# Altium PCB DVL_InterfaceRevA.PcbDoc
Units mil, origin at the board's own origin, x right, y up, seen from the top; angles counter-clockwise.
Board outline 1860 x 1770 mil, 2 copper layers (Top Layer, Bottom Layer); 27 components, 26 nets, 99 pads, 16 vias.
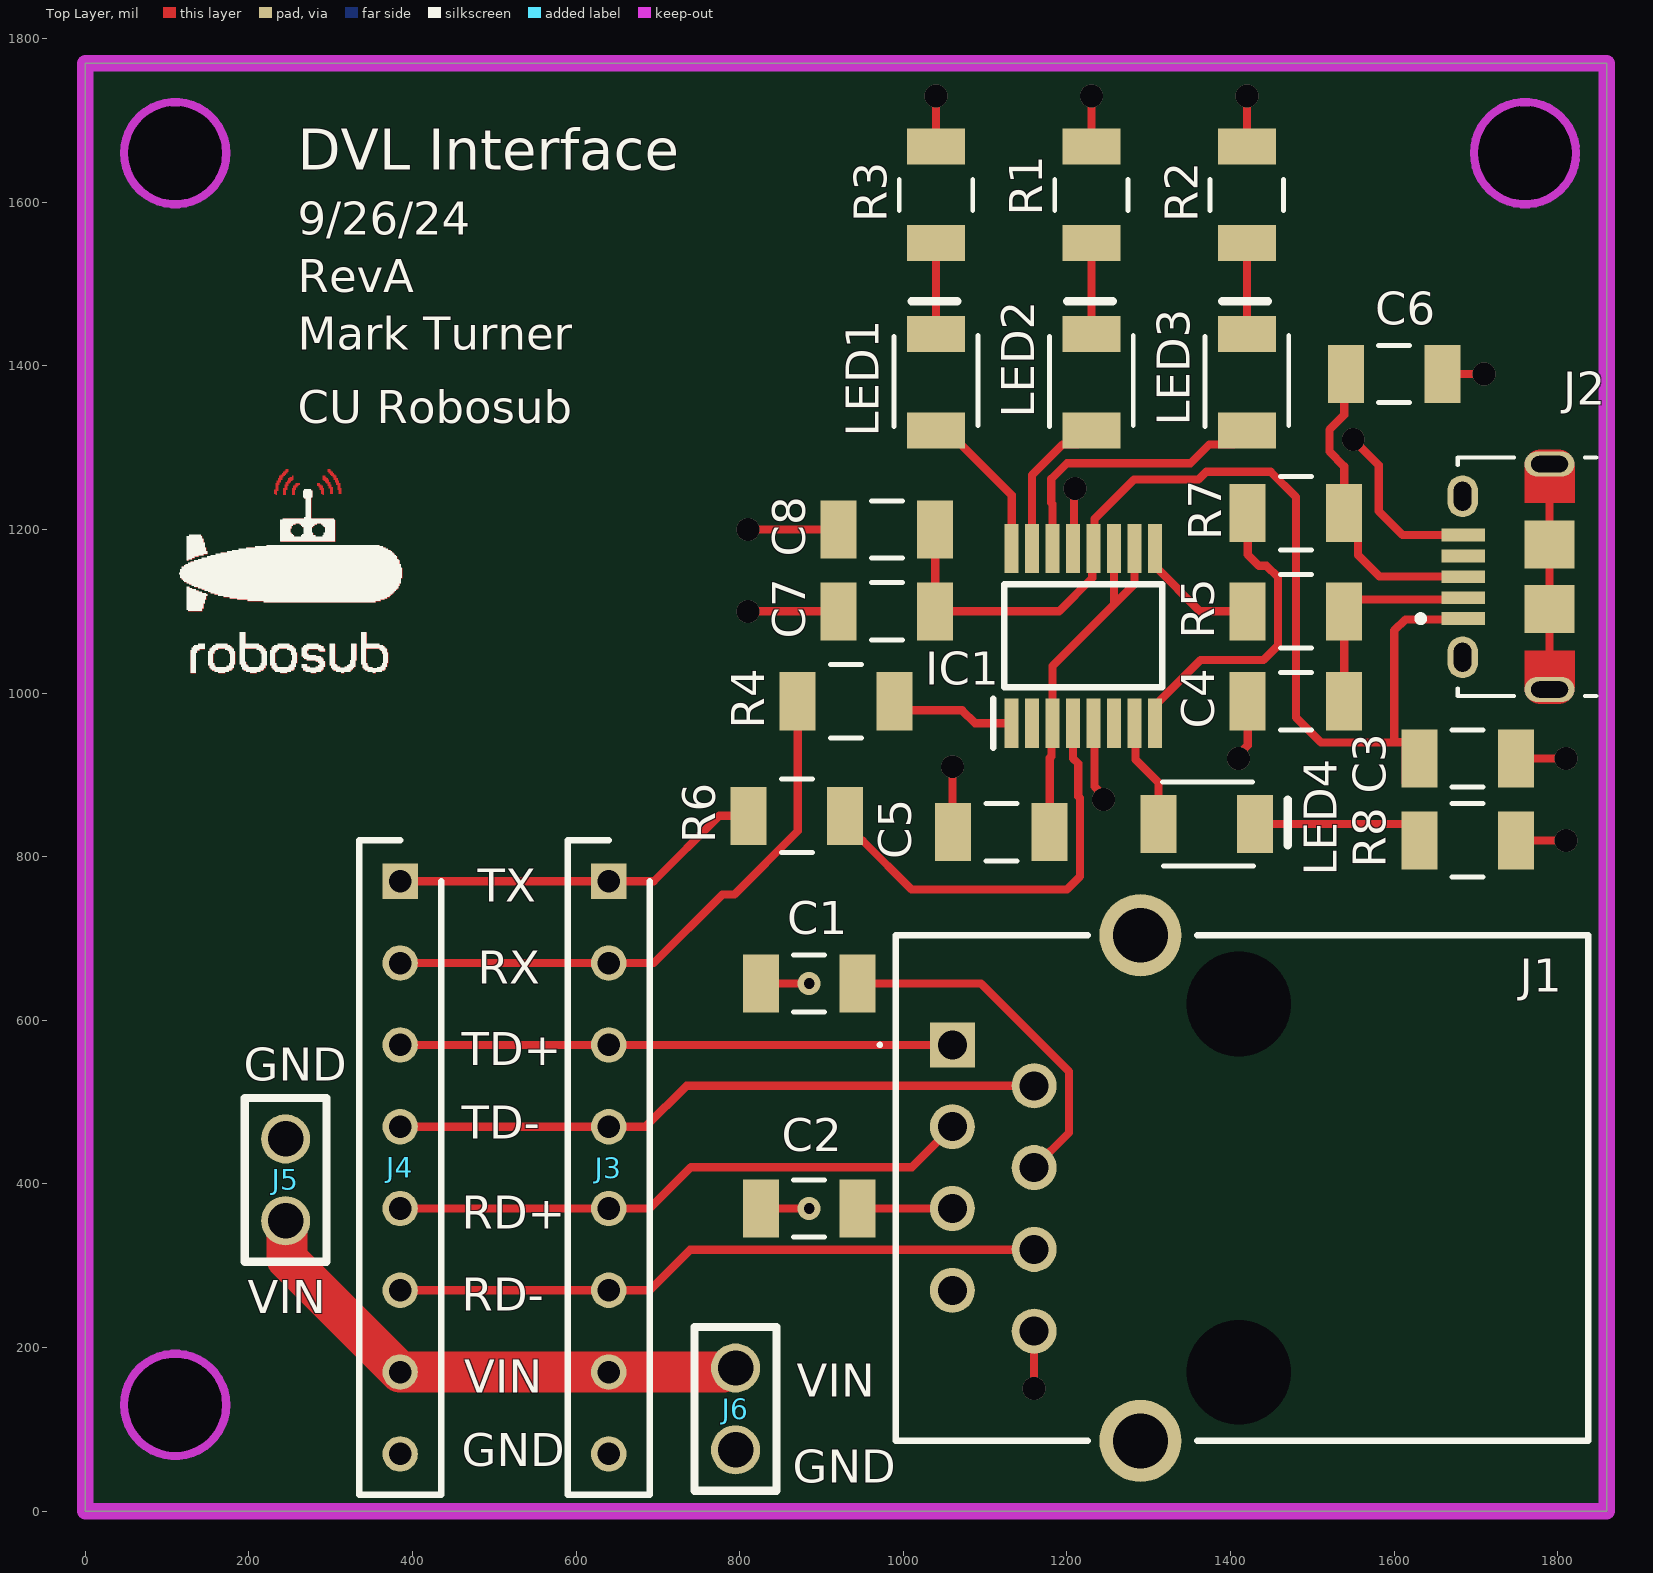
[diagram p0: Top Layer view]
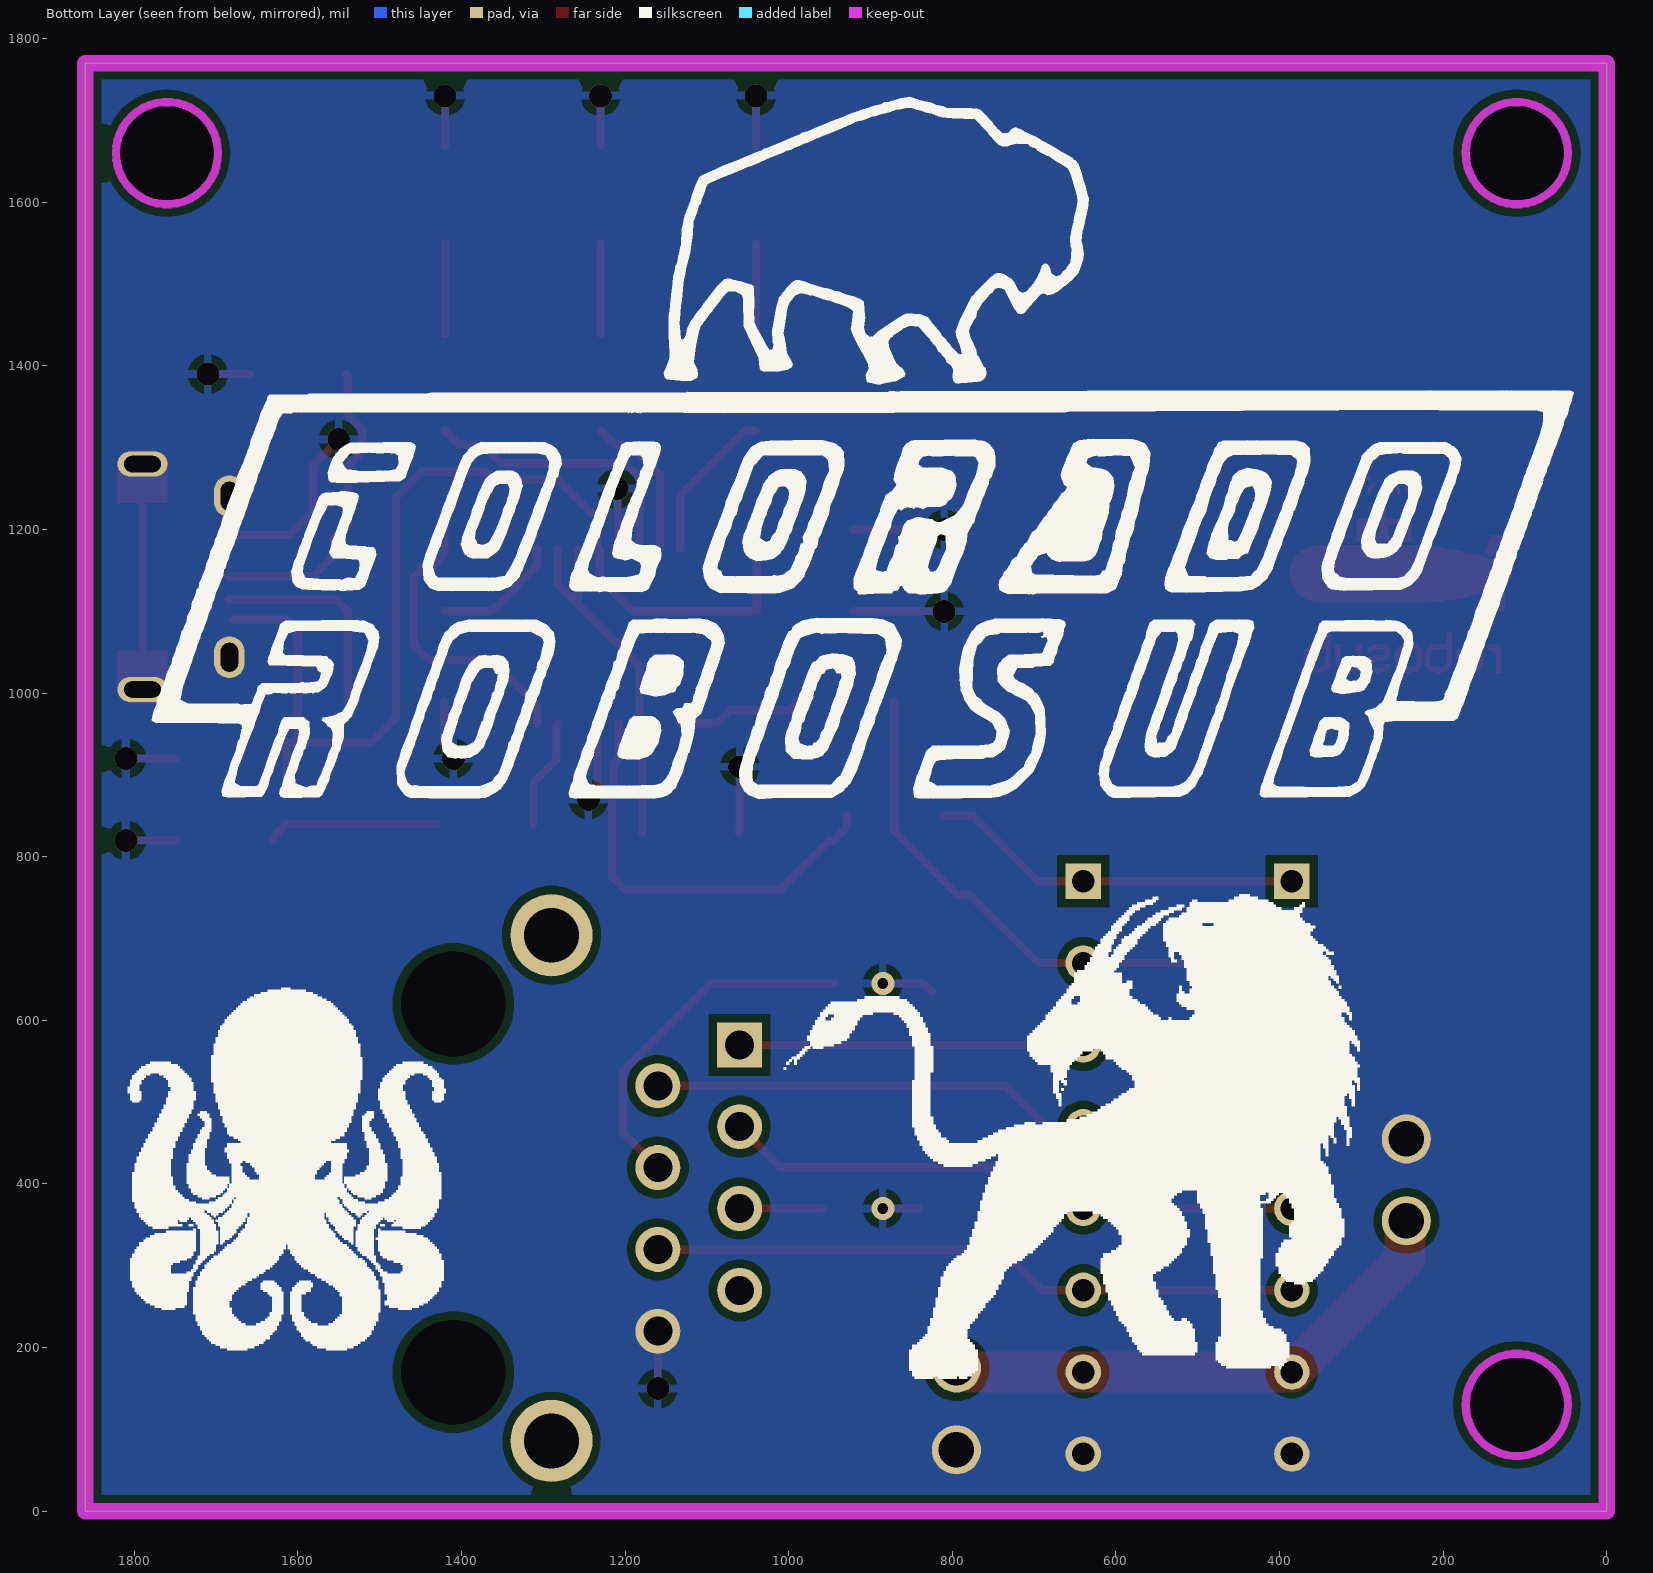
[diagram p1: Bottom Layer view, seen from below]
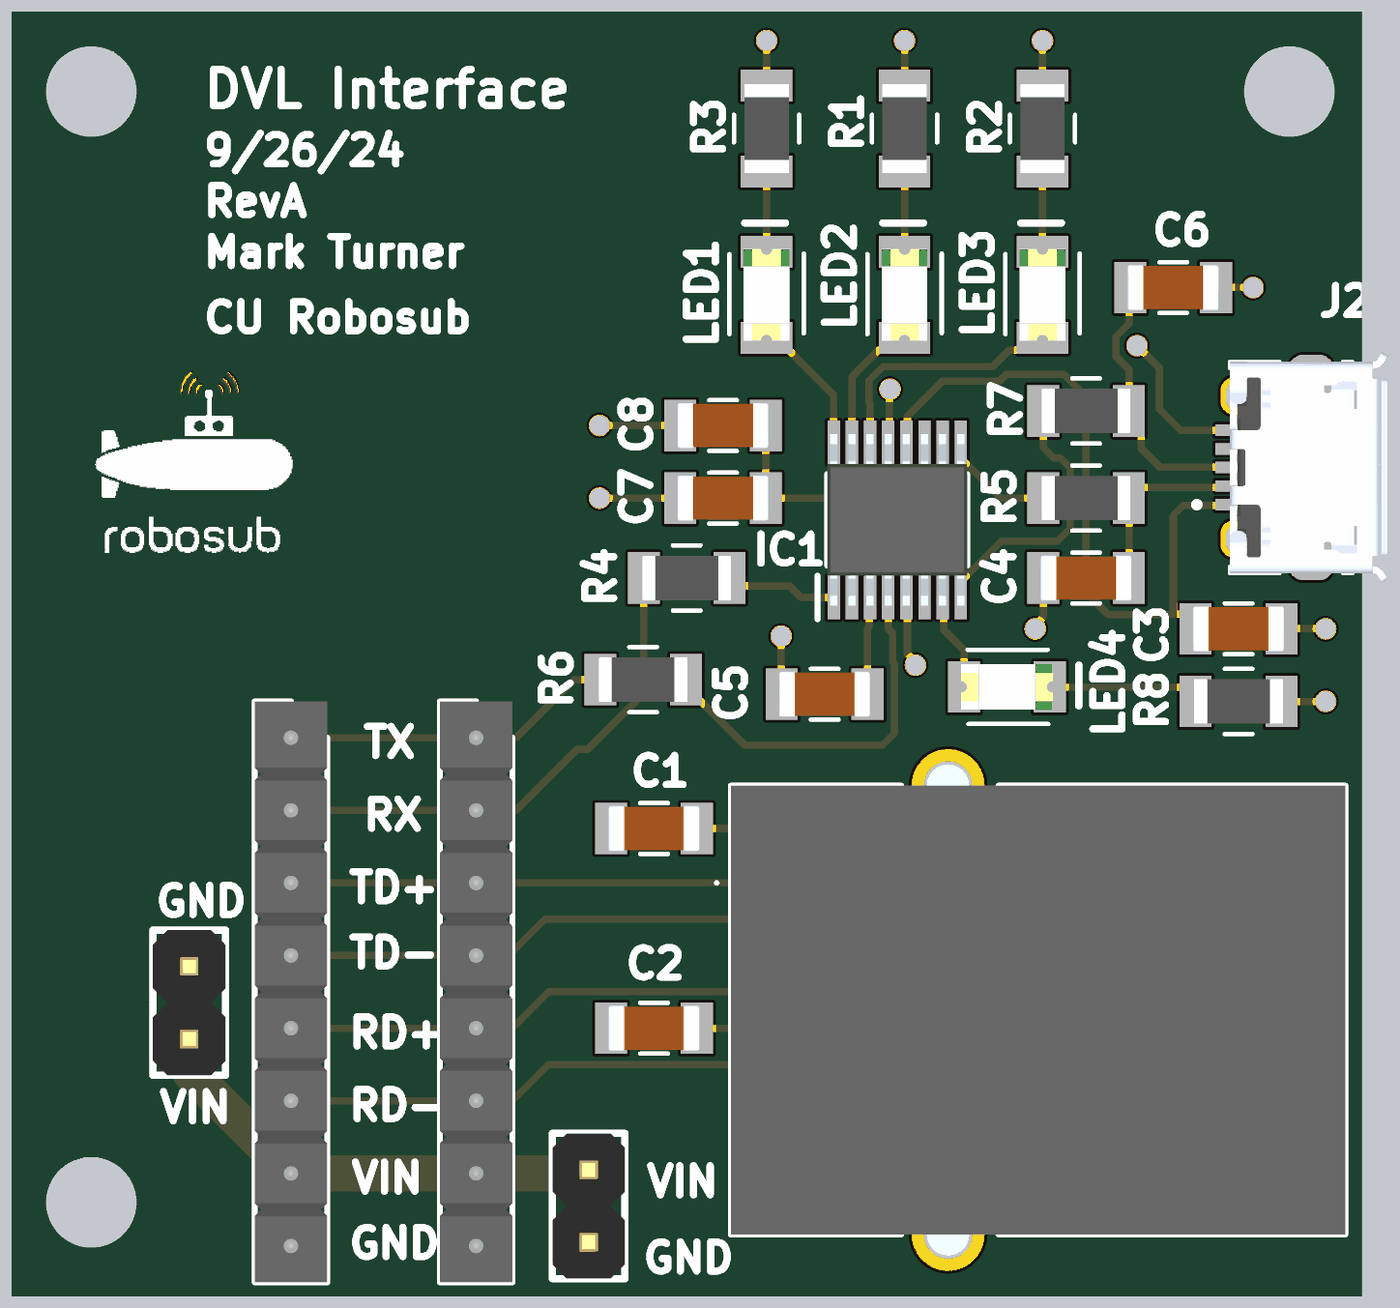
[diagram p2: 3D render of the assembled board from above, using the file's embedded part models]

## Layer stack, top to bottom
Top Solder: solder mask 0.4, Solder Resist, Dk 3.5
Top Layer: signal copper 1.4
Dielectric 1: dielectric 12.6, FR-4, Dk 4.8
Bottom Layer: signal copper 1.4
Bottom Solder: solder mask 0.4, Solder Resist, Dk 3.5

## Board outline
0,0 1860,0 1860,1770 0,1770
cut-out: 47.5,1660 cw(c110,1660) 110,1722.5 cw(c110,1660) 172.5,1660 cw(c110,1660) 110,1597.5 cw(c110,1660)
cut-out: 47.5,130 cw(c110,130) 110,192.5 cw(c110,130) 172.5,130 cw(c110,130) 110,67.5 cw(c110,130)
cut-out: 1697.5,1660 ccw(c1760,1660) 1760,1597.5 ccw(c1760,1660) 1822.5,1660 ccw(c1760,1660) 1760,1722.5 ccw(c1760,1660)

## Design rules (kind name [scope] priority, off if disabled: settings)
BoardOutlineClearance [All] p1: gap=10 ignorepadtopadclearanceinfootprint=FALSE except(0: Arc-SplitContinuation Track-SplitContinuation SMDPad-SplitContinuation THPad-SplitContinuation Via-SplitContinuation Fill-SplitContinuation Poly-SplitContinuation Region-SplitContinuation Text-SplitContinuation)
Clearance [All] p1: gap=10 ignorepadtopadclearanceinfootprint=FALSE
PlaneConnect [All] p1: planeconnectstyle=Direct reliefexpansion=20 reliefentries=4 reliefconductorwidth=10 reliefairgap=10
PolygonConnect [All] p1: thpad.connectstyle=Direct thpad.reliefconductorwidth=10 thpad.reliefentries=4 thpad.polygonreliefangle="90 Angle" thpad.airgapwidth=10 smdpad.connectstyle=Relief smdpad.reliefconductorwidth=10 smdpad.reliefentries=4 smdpad.polygonreliefangle="90 Angle" smdpad.airgapwidth=10 via.connectstyle=Relief via.reliefconductorwidth=10 via.reliefentries=4 via.polygonreliefangle="90 Angle" via.airgapwidth=10
RoutingVias [All] p1: holewidth=13 width=25 viastyle="Through Hole" minholewidth=13 minwidth=25 maxholewidth=60 maxwidth=80
SolderMaskExpansion [All] p1: expansion=4 istentingtop=FALSE
SupplyNets "Schematic Supply Nets" [InNet('GND')] p1: voltage=0.000
UnRoutedNet [All] p1: checkbadconnections=TRUE
Width "Schematic Width Constraint_1" [InNet('VIN')] p1: maxlimit=100 minlimit=10 preferedwidth=20 minimp=50.000000 maximp=50.000000 favimp=50.000000
Width "Schematic Width Constraint" [InNet('GND')] p2: maxlimit=100 minlimit=10 preferedwidth=20 minimp=50.000000 maximp=50.000000 favimp=50.000000
Width [All] p3: maxlimit=20 minlimit=6 preferedwidth=6 minimp=50.000000 maximp=50.000000 favimp=50.000000
28 further rules are at their usual default settings.

## Components (designator, comment, footprint, x,y, rotation, side; value= is the part's Value field where it differs from the comment)
C1 "DNI?" 1206_Passive_Capacitor 885,645 r180 top
C2 "DNI?_ 230/165nF" 1206_Passive_Capacitor 885,370 r180 top
C3 "10nF" 1206_Passive_Capacitor 1690,920 r180 top
C4 "47pF" 1206_Passive_Capacitor 1480,990 r0 top
C5 "100nF" 1206_Passive_Capacitor 1120,830 r0 top
C6 "47pF" 1206_Passive_Capacitor 1600,1390 r180 top
C7 "100nF" 1206_Passive_Capacitor 980,1100 r0 top
C8 "4.7uF" 1206_Passive_Capacitor 980,1200 r0 top
IC1 "FT230XS-R" SOP64P599X175-16N 1220,1070 r90 top
J1 "ARJM11D7-009-NN-EW2" ARJM11D7009NNEW2 1060,570 r90 top
J2 "10118194-0001LF" AMPHENOL_10118194-0001LF 1790,1142.2 r90 top
J3 "08-0625-70" HDRV8W51P0X254_1X8_2032X254X816P 640,770 r270 top
J4 "08-0625-70" HDRV8W51P0X254_1X8_2032X254X816P 385,770 r270 top
J5 "2 PIN" 2_PIN_100MIL 245,405 r90 top
J6 "2 PIN" 2_PIN_100MIL 795,125 r270 top
LED1 "Red" LED_1206 1040,1380 r90 top
LED2 "Red" LED_1206 1230,1380 r90 top
LED3 "Red" LED_1206 1420,1380 r90 top
LED4 "Red" LED_1206 1371,840 r0 top
R1 "10k" 1206_Passive_Resitor 1230,1609 r270 top value=50Ohm?
R2 "10k" 1206_Passive_Resitor 1420,1609 r90 top value=50Ohm?
R3 "10k" 1206_Passive_Resitor 1040,1609 r270 top value=50Ohm?
R4 "10k" 1206_Passive_Resitor 930,990 r0 top value=27Ohm?
R5 "27Ohm" 1206_Passive_Resitor 1480,1100 r0 top
R6 "10k" 1206_Passive_Resitor 870,850 r0 top value=27Ohm?
R7 "27Ohm" 1206_Passive_Resitor 1480,1220 r0 top
R8 "10k" 1206_Passive_Resitor 1690,820 r0 top value=50Ohm?

## Footprints (in the part's own frame and the unit in brackets; to place one, negate y for a bottom-side part, rotate by r counter-clockwise, add the part's x,y. Pads: shape width x height; smd on the part's side, far side on the other; paste and mask are expansions set on the pad)
2_PIN_100MIL [mil]
  round 60 hole 43.31: 1(-50,0) 2(50,0)
  silkscreen extent -100,-50 100,50, body extent -100,-50 100,50, height 336
1206_Passive_Capacitor [mil]
  rect 44x71 smd: 1(-59,0) 2(59,0)
  silkscreen extent -19,-35 19,35, body extent -63,-31 63,32, height 50
1206_Passive_Resitor [mil]
  rect 44x71 smd: 1(-59,0) 2(59,0)
  silkscreen extent -19,-45 19,45, body extent -61,-31 61,31, height 26
AMPHENOL_10118194-0001LF [mm]
  rect 0.4x1.35 smd: 1(-1.3,2.675) 2(-0.65,2.675) 3(0,2.675) 4(0.65,2.675) 5(1.3,2.675)
  oval 0.775x1.55 hole 0.5 slot 1.15 at 90 deg mask+0: SH1(-3.5,0) SH4(3.5,0)
  rect 1.5x1.55 smd: SH2(1,0) SH3(-1,0)
  oval 1.3x0.95 hole 0.55 slot 0.9 at 0 deg: SH5(-2.5,2.7) SH6(2.5,2.7)
  Top Layer region: -2.3,-0.775 -3.445,-0.775 -3.471,-0.774 -3.497,-0.772 -3.523,-0.769 -3.549,-0.764 -3.574,-0.758 -3.6,-0.751 -3.624,-0.742 -3.648,-0.732 -3.672,-0.721 -3.695,-0.708 -3.717,-0.694 -3.739,-0.68 -3.76,-0.664 -3.78,-0.647 -3.799,-0.629 -3.817,-0.61 -3.834,-0.59 -3.85,-0.569 -3.864,-0.547 -3.878,-0.525 -3.891,-0.502 -3.902,-0.478 -3.912,-0.454 -3.921,-0.43 -3.928,-0.404 -3.934,-0.379 -3.939,-0.353 -3.942,-0.327 -3.944,-0.301 -3.945,-0.275 -3.945,0.275 -3.944,0.301 -3.942,0.327 -3.939,0.353 -3.934,0.379 -3.928,0.404 -3.921,0.43 -3.912,0.454 -3.902,0.478 -3.891,0.502 -3.878,0.525 -3.864,0.547 -3.85,0.569 -3.834,0.59 -3.817,0.61 -3.799,0.629 -3.78,0.647 -3.76,0.664 -3.739,0.68 -3.717,0.694 -3.695,0.708 -3.672,0.721 -3.648,0.732 -3.624,0.742 -3.6,0.751 -3.574,0.758 -3.549,0.764 -3.523,0.769 -3.497,0.772 -3.471,0.774 -3.445,0.775 -2.3,0.775
  Top Layer region: 3.471,0.774 3.497,0.772 3.523,0.769 3.549,0.764 3.574,0.758 3.6,0.751 3.624,0.742 3.648,0.732 3.672,0.721 3.695,0.708 3.717,0.694 3.739,0.68 3.76,0.664 3.78,0.647 3.799,0.629 3.817,0.61 3.834,0.59 3.85,0.569 3.864,0.547 3.878,0.525 3.891,0.502 3.902,0.478 3.912,0.454 3.921,0.43 3.928,0.404 3.934,0.379 3.939,0.353 3.942,0.327 3.944,0.301 3.945,0.275 3.945,-0.275 3.944,-0.301 3.942,-0.327 3.939,-0.353 3.934,-0.379 3.928,-0.404 3.921,-0.43 3.912,-0.454 3.902,-0.478 3.891,-0.502 3.878,-0.525 3.864,-0.547 3.85,-0.569 3.834,-0.59 3.817,-0.61 3.799,-0.629 3.78,-0.647 3.76,-0.664 3.739,-0.68 3.717,-0.694 3.695,-0.708 3.672,-0.721 3.648,-0.732 3.624,-0.742 3.6,-0.751 3.574,-0.758 3.549,-0.764 3.523,-0.769 3.497,-0.772 3.471,-0.774 3.445,-0.775 2.3,-0.775 2.3,0.775 3.445,0.775
  silkscreen extent -3.7,-1.45 3.7,4.1, body extent -4.02,-2.68 4.02,2.85, height 2.67
ARJM11D7009NNEW2 [mm]
  rect 1.4x1.4 hole 0.9: J1(0,0)
  round 1.4 hole 0.9: J2(-1.27,-2.54) J3(-2.54,0) J4(-3.81,-2.54) J5(-5.08,0) J6(-6.35,-2.54) J7(-7.62,0) J8(-8.89,-2.54)
  round 2.55 hole 1.7: MH1(3.405,-5.84) MH2(-12.295,-5.84)
  round 1.625 hole 3.25 unplated: MH3(-10.16,-8.89) MH4(1.27,-8.89)
  silkscreen extent -12.29,-19.74 3.4,2.3, body extent -13.05,-19.74 4.16,1.76, height 14.15
HDRV8W51P0X254_1X8_2032X254X816P [mm]
  rect 1.1x1.1 hole 0.7: 1(0,0)
  round 1.1 hole 0.7: 2(2.54,0) 3(5.08,0) 4(7.62,0) 5(10.16,0) 6(12.7,0) 7(15.24,0) 8(17.78,0)
  silkscreen extent -1.27,-1.27 19.05,1.27, body extent -1.27,-1.27 19.05,1.27, height 8.16
LED_1206 [mil]
  rect 44x71 smd: 1(-59,0) 2(59,0)
  silkscreen extent -54,-51 99,51, body extent -63,-31 63,31, height 28
SOP64P599X175-16N [mm]
  rect 1.526x0.435 smd: 1(-2.712,2.222) 2(-2.712,1.588) 3(-2.712,0.952) 4(-2.712,0.318) 5(-2.712,-0.318) 6(-2.712,-0.952) 7(-2.712,-1.588) 8(-2.712,-2.222) 9(2.712,-2.222) 10(2.712,-1.588) 11(2.712,-0.952) 12(2.712,-0.318) 13(2.712,0.318) 14(2.712,0.952) 15(2.712,1.588) 16(2.712,2.222)
  silkscreen extent -3.47,-2.45 1.6,2.79, body extent -3,-2.45 3,2.45, height 1.75

## Part data
C1 C2 C3 C5 C7 C8: library part C_10uF_1206, "10uF ±10% 50V X5R 1206 Multilayer Ceramic Capacitors MLCC - SMD/SMT RoHS", LCSC Part#=C13585, MFR Part #=CL31A106KBHNNNE, Datasheet=https://datasheet.lcsc.com/lcsc/1810221112_Samsung-Electro-Mechanics-CL31A106KBHNNNE_C13585.pdf, Type=Basic
C4 C6: library part C_47nF_1206, "47nF ±5% 50V C0G 1206 Multilayer Ceramic Capacitors MLCC - SMD/SMT RoHS", LCSC Part#=C21812, MFR Part #=GRM31M5C1H473JA01L, Datasheet=https://datasheet.lcsc.com/lcsc/1810201313_Murata-Electronics-GRM31M5C1H473JA01L_C21812.pdf, Type=Extended
IC1: "Integrated Circuit", Manufacturer_Name="FTDI Chip", Mouser Part Number=895-FT230XS-R, Arrow Part Number=FT230XS-R, Arrow Price/Stock=http://www.arrow.com/en/products/ft230xs-r/ftdi-chip, Datasheet Link=http://www.ftdichip.com/Support/Documents/DataSheets/ICs/DS_FT230X.pdf, Height=1.753mm, Manufacturer_Part_Number=FT230XS-R, Mouser Price/Stock=https://www.mouser.co.uk/ProductDetail/FTDI/FT230XS-R?qs=Gp1Yz1mis3XyCLeYOseSng%3D%3D
J1: "Connector", Manufacturer_Name=ABRACON, Mouser Part Number=815-RJM11D7009NNEW2, Arrow Part Number=ARJM11D7-009-NN-EW2, Arrow Price/Stock=null?region=nac, Datasheet Link=https://abracon.com/Magnetics/ARJM11.pdf, Height=14.05mm, Manufacturer_Part_Number=ARJM11D7-009-NN-EW2, Mouser Price/Stock=https://www.mouser.co.uk/ProductDetail/ABRACON/ARJM11D7-009-NN-EW2?qs=YCa%2FAAYMW03eZFC4XXAjJg%3D%3D
J2: "Micro USB, Input Output Connectors, B TYPE RECEPTACLE with flange", Package=None, Check_prices=https://www.snapeda.com/parts/10118194-0001LF/Amphenol+FCI/view-part/?ref=eda, MF="Amphenol ICC", MP=10118194-0001LF, SnapEDA_Link=https://www.snapeda.com/parts/10118194-0001LF/Amphenol+FCI/view-part/?ref=snap
J3 J4: "Connector", Manufacturer_Name=ARIES, Mouser Part Number=535-08-0625-70, Datasheet Link=https://www.mouser.in/datasheet/2/35/12036-pin-line-header-1224908.pdf, Height=8.16mm, Manufacturer_Part_Number=08-0625-70, Mouser Price/Stock=https://www.mouser.co.uk/ProductDetail/Aries-Electronics/08-0625-70?qs=BpaRKvA4VqGb7C%252By2JfgtQ%3D%3D
J5 J6: library part JM_2_PIN_MALE, "2.54mm Straight 2 1 Header，Breakaway Through Hole,P=2.54mm Pin Header & Female Header ROHS", LCSC Part#=C124375, MFR Part #=B-2100S02P-A110, Datasheet=https://datasheet.lcsc.com/lcsc/1811151421_Ckmtw-Shenzhen-Cankemeng-B-2100S02P-A110_C124375.pdf, Type=Extended
LED1 LED2 LED3 LED4: library part LED_RED_1206, "Red 621~631nm 1206 Light Emitting Diodes (LED) RoHS", LCSC Part#=C93133, MFR Part #=15-21/R6C-FQ1R1B/2T, Datasheet=https://datasheet.lcsc.com/szlcsc/1811151241_Everlight-Elec-15-21-R6C-FQ1R1B-2T_C93133.pdf, Type=Extended
R1 R2 R3 R4 R6 R8: library part R_10KOhm_1206, "10 kOhms ±5% 0.25W, 1/4W Chip Resistor 1206 (3216 Metric) Automotive AEC-Q200 Thick Film", LCSC Part#=C17902, MFR Part #=RMCF1206FT10K0, Digikey Link=https://www.digikey.com/en/products/detail/stackpole-electronics-inc/RMCF1206FT10K0/1759669, Type=Basic
R5 R7: library part R_22Ohm_1206, "CHIP RESISTOR - SURFACE MOUNT 22OHMS ±1% 1/4W 1206 ROHS", LCSC Part#=C17958, MFR Part #=1206W4F220JT5E, Type=Basic

## Via types
v1: diameter 28, hole 28, Top Layer to Bottom Layer, 14 vias
v2: diameter 28, hole 13, Top Layer to Bottom Layer, 2 vias

## Nets (pads, with @x,y where several pads share a name; then routed paths per layer and width w, separated by ;. In a path a pad name is that pad's centre, name@x,y a point inside that pad or via, vN(x,y) a via of type N, cw(c..) or ccw(c..) an arc to the next point about the centre after c; other vN are vias at no path point)
GND: C1.2 C2.2 C3.1 C4.1 C5.1 C6.1 C7.1 C8.1 IC1.5 IC1.13 J1.J8 J2.5 J2.SH1 J2.SH2 J2.SH3 J2.SH4 J2.SH5 J2.SH6 J3.8 J4.8 J5.2 J6.2 R1.1 R2.2 R3.1 R8.2 | length 1579.7
  Top Layer w10: v1(810,1100) C7.1 ; v1(810,1200) C8.1 ; C1.2@825,635 835,645 v2(885,645) ; C2.2@841,370 v2(885,370) ; R3.1 v1(1040,1730) ; v1(1060,910) 1060,831 C5.1 ; v1(1160,150) J1.J8 ; IC1.13 1208.74,1178.03 1208.74,1248.74 v1(1210,1250) ; R1.1 v1(1230,1730) ; IC1.5 1233.92,961.83 1233.92,885.95 1245,874.87 v1(1245,870) ; v1(1410,920) 1410,924.87 1421,935.87 C4.1 ; R2.2 v1(1420,1730) ; v1(1550,1310) 1581.15,1278.85 1581.15,1222.57 1610.34,1193.39 J2.5 ; C6.1@1660,1389 C6.1 v1(1710,1390) ; R8.2 v1(1810,820) ; C3.1 v1(1810,920) ; J2.SH1 J2.SH3 J2.SH2 J2.SH4
NetC1_1: C1.1 J1.J4 | length 438.3
  Top Layer w10: C1.1 1095.19,645 1202.56,537.63 1202.56,462.56 J1.J4
NetC2_1: C2.1 J1.J5 | length 101
  Top Layer w10: C2.1@959,370 J1.J5
NetC4_2: C4.2 J2.2 R5.2 | length 261.7
  Top Layer w10: C4.2 R5.2 1553.41,1114.41 J2.2@1684.69,1114.41
NetC5_2: C5.2 IC1.3 IC1.10 IC1.11 | length 458.2
  Top Layer w10: C5.2 1179,920.5 1181.04,922.54 1181.04,961.75 IC1.3 1182.52,1033.22 1257.48,1108.18 ; IC1.11 1257.48,1108.18 ; IC1.10 1282.52,1133.22 1257.48,1108.18
NetC6_2: C6.2 J2.3 R7.2 | length 383.6
  Top Layer w10: C6.2 1539,1388 1539,1340.01 1521,1322.01 1521,1295.26 1539,1277.26 R7.2 1539,1206.5 1556,1189.5 1556,1183.64 1556,1168.61 1581.9,1142.72 J2.3@1684.69,1142.72
NetIC1_1: IC1.1 R4.2 | length 154.6
  Top Layer w10: R4.2 1000,979 1072.01,979 1087.78,963.23 IC1.1
NetIC1_4: IC1.4 R6.2 | length 529.6
  Top Layer w10: R6.2 929,836.5 946,819.5 950.5,819.5 1010,760 1200,760 1216,776 1216,871.71 1213.92,873.8 1213.92,913.8 1207.48,920.23 IC1.4
NetIC1_7: IC1.7 LED4.1 | length 135.4
  Top Layer w10: IC1.7 1283.92,961.83 1283.92,918.58 1312,890.5 LED4.1
NetIC1_8: IC1.8 R7.1 | length 384.9
  Top Layer w10: IC1.8 1307.48,984.7 1363.28,1040.5 1440.21,1040.5 1458,1058.29 1458,1141.71 1444.11,1155.61 1434.89,1155.61 1421,1169.5 R7.1
NetIC1_9: IC1.9 R5.1 | length 157.9
  Top Layer w10: IC1.9 1307.48,1155.3 1362.78,1100 R5.1
NetIC1_14: IC1.14 LED3.1 | length 349.3
  Top Layer w10: IC1.14 1182.52,1231.15 1181,1232.67 1181,1262.01 1199.99,1281.01 1351.01,1281.01 1374,1304 1403,1304 LED3.1
NetIC1_15: IC1.15 LED2.1 | length 185
  Top Layer w10: IC1.15 1157.48,1266.78 1194.7,1304 1213,1304 LED2.1
NetIC1_16: IC1.16 LED1.1 | length 190.5
  Top Layer w10: LED1.1 1053.5,1321 1132.52,1241.98 IC1.16
NetLED1_2: LED1.2 R3.2 | length 111
  Top Layer w10: LED1.2 R3.2
NetLED2_2: LED2.2 R1.2 | length 111
  Top Layer w10: LED2.2 R1.2
NetLED3_2: LED3.2 R2.1 | length 111
  Top Layer w10: LED3.2 R2.1
NetLED4_2: LED4.2 R8.1 | length 211
  Top Layer w10: LED4.2 1614,840 1631,823 R8.1
RD+: J1.J3 J3.5 J4.5 | length 716.4
  Top Layer w10: J4.5 J3.5 690,370 740.5,420.5 1010.5,420.5 J1.J3
RD-: J1.J6 J3.6 J4.6 | length 795.7
  Top Layer w10: J4.6 J3.6 690,270 739.5,319.5 1159.5,319.5 J1.J6
RX_DVL: J3.2 J4.2 R4.1 | length 711.5
  Top Layer w10: J4.2 J3.2 695,670 778.83,753.83 793.54,753.83 871,831.29 R4.1
TD+: J1.J1 J3.3 J4.3 | length 675
  Top Layer w10: J4.3 J3.3 J1.J1
TD-: J1.J2 J3.4 J4.4 | length 795.7
  Top Layer w10: J4.4 J3.4 685,470 735,520 J1.J2
TX_DVL: J3.1 J4.1 R6.1 | length 459.1
  Top Layer w10: J4.1 570,770 695,770 775,850 R6.1
USB_Vcc: C3.2 C7.2 C8.2 IC1.12 J2.1 | length 1353
  Top Layer w10: C8.2 C7.2 1190.52,1100 1231.04,1140.52 1231.04,1175.3 IC1.12 1233.92,1178.17 1233.92,1213.02 1281.9,1261.01 1360.81,1261.01 1370.3,1270.5 1449.21,1270.5 1480,1239.71 1480,970.29 1510.79,939.5 1599.58,939.5 1600.08,940 ; C3.2@1614,890.5 1614,940 1600.08,940 ; J2.1@1680,1090 1613.73,1090 1600.08,1076.35 1600.08,940
VIN: J3.7 J4.7 J5.1 J6.1 | length 638
  Top Layer w50: J5.1 246.75,353.25 246.75,308.25 J4.7 570,170 J6.1@780,170
pads on no net: IC1.2 IC1.6 J1.J7 J1.MH1 J1.MH2 J1.MH3 J1.MH4 J2.4

## Polygon pours and split planes (outlines as drawn)
GND on Bottom Layer "GND_L02_P000" (solid, pour order 0): -280,1990 1850,1990 1850,0 1840,10 -290,10

## Keep-outs
Keep-Out Layer:
  circle w10: c1760,1660 r62.5
  circle w10: c110,1660 r62.5
  circle w10: c110,130 r62.5
  pour cut-out: 1697.5,1660 ccw(c1760,1660) 1760,1597.5 ccw(c1760,1660) 1822.5,1660 ccw(c1760,1660) 1760,1722.5 ccw(c1760,1660)
  lines w20: 0,0 1860,0 1860,1770 0,1770 0,0

## Other copper
Top Layer:
  region: 285.45,1253.27 283.91,1253.27 283.91,1256.36 287,1256.36 287,1254.81 288.55,1254.81 288.55,1253.27 290.09,1253.27 290.09,1250.18 291.64,1250.18 291.64,1242.44 290.09,1242.44 290.09,1243.99 288.55,1243.99 288.55,1248.63 287,1248.63 287,1251.72 285.45,1251.72
  region: 294.73,1256.36 294.73,1257.91 293.19,1257.91 293.19,1259.45 291.64,1259.45 291.64,1261 290.09,1261 290.09,1265.64 293.19,1265.64 293.19,1264.09 294.73,1264.09 294.73,1262.55 296.28,1262.55 296.28,1261 297.82,1261 297.82,1257.91 299.37,1257.91 299.37,1254.81 300.92,1254.81 300.92,1251.72 302.46,1251.72 302.46,1243.99 299.37,1243.99 299.37,1250.18 297.82,1250.18 297.82,1253.27 296.28,1253.27 296.28,1256.36
  region: 259.16,1253.27 259.16,1251.72 257.62,1251.72 257.62,1248.63 256.07,1248.63 256.07,1242.44 252.98,1242.44 252.98,1250.18 254.53,1250.18 254.53,1253.27 256.07,1253.27 256.07,1254.81 257.62,1254.81 257.62,1256.36 262.26,1256.36 262.26,1254.81 260.71,1254.81 260.71,1253.27
  region: 174.11,1058.42 177.21,1058.42 177.21,1056.88 178.75,1056.88 178.75,1055.33 180.3,1055.33 180.3,1053.78 181.85,1053.78 181.85,1050.69 183.39,1050.69 183.39,1035.23 181.85,1035.23 181.85,1030.59 180.3,1030.59 180.3,1029.04 178.75,1029.04 178.75,1027.49 175.66,1027.49 175.66,1025.95 171.02,1025.95 171.02,1024.4 163.29,1024.4 163.29,1025.95 158.65,1025.95 158.65,1027.49 155.56,1027.49 155.56,1029.04 154.01,1029.04 154.01,1030.59 152.46,1030.59 152.46,1033.68 150.92,1033.68 150.92,1050.69 152.46,1050.69 152.46,1053.78 154.01,1053.78 154.01,1055.33 155.56,1055.33 155.56,1056.88 157.1,1056.88 157.1,1058.42 160.2,1058.42 160.2,1059.97 174.11,1059.97 hole: 171.02,1053.78 163.29,1053.78 163.29,1052.24 160.2,1052.24 160.2,1050.69 158.65,1050.69 158.65,1047.6 157.1,1047.6 157.1,1036.77 158.65,1036.77 158.65,1033.68 160.2,1033.68 160.2,1032.13 172.57,1032.13 172.57,1033.68 175.66,1033.68 175.66,1036.77 177.21,1036.77 177.21,1047.6 175.66,1047.6 175.66,1050.69 174.11,1050.69 174.11,1052.24 171.02,1052.24
  region: 296.28,1273.37 299.37,1273.37 299.37,1271.82 300.92,1271.82 300.92,1270.28 302.46,1270.28 302.46,1268.73 304.01,1268.73 304.01,1267.19 305.56,1267.19 305.56,1265.64 307.1,1265.64 307.1,1262.55 308.65,1262.55 308.65,1259.45 310.2,1259.45 310.2,1256.36 311.74,1256.36 311.74,1250.18 313.29,1250.18 313.29,1243.99 310.2,1243.99 310.2,1248.63 308.65,1248.63 308.65,1254.81 307.1,1254.81 307.1,1257.91 305.56,1257.91 305.56,1261 304.01,1261 304.01,1264.09 302.46,1264.09 302.46,1265.64 300.92,1265.64 300.92,1267.19 299.37,1267.19 299.37,1268.73 297.82,1268.73 297.82,1270.28 296.28,1270.28 296.28,1271.82
  region: 291.64,1053.78 293.19,1053.78 293.19,1050.69 287,1050.69 287,1052.24 285.45,1052.24 285.45,1053.78 273.08,1053.78 273.08,1052.24 271.54,1052.24 271.54,1047.6 273.08,1047.6 273.08,1046.05 282.36,1046.05 282.36,1044.51 288.55,1044.51 288.55,1042.96 290.09,1042.96 290.09,1041.41 291.64,1041.41 291.64,1038.32 293.19,1038.32 293.19,1032.13 291.64,1032.13 291.64,1029.04 290.09,1029.04 290.09,1027.49 288.55,1027.49 288.55,1025.95 282.36,1025.95 282.36,1024.4 276.18,1024.4 276.18,1025.95 269.99,1025.95 269.99,1027.49 266.9,1027.49 266.9,1030.59 265.35,1030.59 265.35,1035.23 271.54,1035.23 271.54,1032.13 274.63,1032.13 274.63,1030.59 282.36,1030.59 282.36,1032.13 285.45,1032.13 285.45,1033.68 287,1033.68 287,1036.77 285.45,1036.77 285.45,1038.32 282.36,1038.32 282.36,1039.87 271.54,1039.87 271.54,1041.41 268.44,1041.41 268.44,1042.96 266.9,1042.96 266.9,1044.51 265.35,1044.51 265.35,1055.33 266.9,1055.33 266.9,1056.88 268.44,1056.88 268.44,1058.42 271.54,1058.42 271.54,1059.97 285.45,1059.97 285.45,1058.42 288.55,1058.42 288.55,1056.88 291.64,1056.88 291.64,1055.33
  region: 135.45,1033.68 135.45,1024.4 129.27,1024.4 129.27,1052.24 130.81,1052.24 130.81,1055.33 132.36,1055.33 132.36,1056.88 133.91,1056.88 133.91,1058.42 138.55,1058.42 138.55,1059.97 146.28,1059.97 146.28,1053.78 140.09,1053.78 140.09,1052.24 137,1052.24 137,1049.14 135.45,1049.14 135.45,1035.23
  region: 143.19,1103.27 143.19,1100.18 126.18,1100.18 126.18,1101.72 124.63,1101.72 124.63,1129.56 127.72,1129.56 127.72,1128.01 130.81,1128.01 130.81,1126.46 135.45,1126.46 135.45,1124.92 138.55,1124.92 138.55,1123.37 143.19,1123.37 143.19,1121.82 147.82,1121.82 147.82,1120.28 149.37,1120.28 149.37,1118.73 147.82,1118.73 147.82,1114.09 146.28,1114.09 146.28,1109.45 144.73,1109.45 144.73,1103.27
  region: 248.34,1253.27 246.79,1253.27 246.79,1248.63 245.25,1248.63 245.25,1242.44 242.15,1242.44 242.15,1250.18 243.7,1250.18 243.7,1254.81 245.25,1254.81 245.25,1257.91 246.79,1257.91 246.79,1259.45 248.34,1259.45 248.34,1262.55 249.89,1262.55 249.89,1264.09 252.98,1264.09 252.98,1265.64 254.53,1265.64 254.53,1261 252.98,1261 252.98,1259.45 251.43,1259.45 251.43,1257.91 249.89,1257.91 249.89,1256.36 248.34,1256.36 248.34,1254.81
  region: 246.79,1268.73 245.25,1268.73 245.25,1267.19 243.7,1267.19 243.7,1265.64 242.15,1265.64 242.15,1264.09 240.61,1264.09 240.61,1261 239.06,1261 239.06,1257.91 237.52,1257.91 237.52,1254.81 235.97,1254.81 235.97,1247.08 234.42,1247.08 234.42,1242.44 232.88,1242.44 232.88,1243.99 231.33,1243.99 231.33,1248.63 232.88,1248.63 232.88,1256.36 234.42,1256.36 234.42,1259.45 235.97,1259.45 235.97,1262.55 237.52,1262.55 237.52,1265.64 239.06,1265.64 239.06,1267.19 240.61,1267.19 240.61,1268.73 242.15,1268.73 242.15,1270.28 243.7,1270.28 243.7,1271.82 245.25,1271.82 245.25,1273.37 248.34,1273.37 248.34,1270.28 246.79,1270.28
  region: 299.37,1041.41 299.37,1059.97 305.56,1059.97 305.56,1035.23 307.1,1035.23 307.1,1033.68 308.65,1033.68 308.65,1032.13 311.74,1032.13 311.74,1030.59 317.93,1030.59 317.93,1032.13 321.02,1032.13 321.02,1033.68 322.57,1033.68 322.57,1035.23 324.11,1035.23 324.11,1039.87 325.66,1039.87 325.66,1059.97 331.85,1059.97 331.85,1039.87 330.3,1039.87 330.3,1032.13 328.75,1032.13 328.75,1030.59 327.21,1030.59 327.21,1029.04 325.66,1029.04 325.66,1027.49 324.11,1027.49 324.11,1025.95 316.38,1025.95 316.38,1024.4 313.29,1024.4 313.29,1025.95 307.1,1025.95 307.1,1027.49 304.01,1027.49 304.01,1029.04 302.46,1029.04 302.46,1030.59 300.92,1030.59 300.92,1033.68 299.37,1033.68 299.37,1039.87
  region: 276.18,1247.08 277.72,1247.08 277.72,1239.35 276.18,1239.35 276.18,1213.06 304.01,1213.06 304.01,1211.52 305.56,1211.52 305.56,1185.23 239.06,1185.23 239.06,1211.52 242.15,1211.52 242.15,1213.06 268.44,1213.06 268.44,1214.61 269.99,1214.61 269.99,1237.8 268.44,1237.8 268.44,1239.35 266.9,1239.35 266.9,1247.08 268.44,1247.08 268.44,1248.63 276.18,1248.63 hole: 262.26,1206.88 257.62,1206.88 257.62,1205.33 254.53,1205.33 254.53,1203.78 252.98,1203.78 252.98,1200.69 251.43,1200.69 251.43,1196.05 252.98,1196.05 252.98,1194.51 254.53,1194.51 254.53,1192.96 256.07,1192.96 256.07,1191.41 263.8,1191.41 263.8,1192.96 265.35,1192.96 265.35,1194.51 266.9,1194.51 266.9,1202.24 265.35,1202.24 265.35,1203.78 263.8,1203.78 263.8,1205.33 262.26,1205.33 hole: 288.55,1206.88 283.91,1206.88 283.91,1205.33 280.81,1205.33 280.81,1203.78 279.27,1203.78 279.27,1202.24 277.72,1202.24 277.72,1196.05 279.27,1196.05 279.27,1192.96 282.36,1192.96 282.36,1191.41 290.09,1191.41 290.09,1192.96 291.64,1192.96 291.64,1196.05 293.19,1196.05 293.19,1202.24 291.64,1202.24 291.64,1203.78 290.09,1203.78 290.09,1205.33 288.55,1205.33
  region: 382.88,1162.03 384.42,1162.03 384.42,1157.39 385.97,1157.39 385.97,1152.75 387.52,1152.75 387.52,1140.38 385.97,1140.38 385.97,1134.2 384.42,1134.2 384.42,1131.1 382.88,1131.1 382.88,1128.01 381.33,1128.01 381.33,1126.46 379.78,1126.46 379.78,1124.92 378.24,1124.92 378.24,1123.37 376.69,1123.37 376.69,1121.82 375.14,1121.82 375.14,1120.28 373.6,1120.28 373.6,1118.73 372.05,1118.73 372.05,1117.19 368.96,1117.19 368.96,1115.64 365.87,1115.64 365.87,1114.09 361.23,1114.09 361.23,1112.55 355.04,1112.55 355.04,1111 218.96,1111 218.96,1112.55 198.86,1112.55 198.86,1114.09 186.48,1114.09 186.48,1115.64 177.21,1115.64 177.21,1117.19 169.47,1117.19 169.47,1118.73 163.29,1118.73 163.29,1120.28 158.65,1120.28 158.65,1121.82 154.01,1121.82 154.01,1123.37 150.92,1123.37 150.92,1124.92 146.28,1124.92 146.28,1126.46 143.19,1126.46 143.19,1128.01 138.55,1128.01 138.55,1129.56 133.91,1129.56 133.91,1131.1 130.81,1131.1 130.81,1132.65 127.72,1132.65 127.72,1134.2 124.63,1134.2 124.63,1135.74 121.54,1135.74 121.54,1137.29 119.99,1137.29 119.99,1138.84 118.44,1138.84 118.44,1140.38 116.9,1140.38 116.9,1145.02 115.35,1145.02 115.35,1146.57 116.9,1146.57 116.9,1151.21 118.44,1151.21 118.44,1154.3 121.54,1154.3 121.54,1155.85 123.08,1155.85 123.08,1157.39 126.18,1157.39 126.18,1158.94 129.27,1158.94 129.27,1160.48 133.91,1160.48 133.91,1162.03 138.55,1162.03 138.55,1163.58 143.19,1163.58 143.19,1165.12 149.37,1165.12 149.37,1166.67 154.01,1166.67 154.01,1168.22 160.2,1168.22 160.2,1169.76 166.38,1169.76 166.38,1171.31 174.11,1171.31 174.11,1172.86 180.3,1172.86 180.3,1174.4 188.03,1174.4 188.03,1175.95 197.31,1175.95 197.31,1177.49 208.13,1177.49 208.13,1179.04 222.05,1179.04 222.05,1180.59 359.68,1180.59 359.68,1179.04 364.32,1179.04 364.32,1177.49 367.41,1177.49 367.41,1175.95 370.51,1175.95 370.51,1174.4 373.6,1174.4 373.6,1172.86 375.14,1172.86 375.14,1171.31 376.69,1171.31 376.69,1169.76 378.24,1169.76 378.24,1168.22 379.78,1168.22 379.78,1166.67 381.33,1166.67 381.33,1163.58 382.88,1163.58
  region: 144.73,1168.22 138.55,1168.22 138.55,1166.67 133.91,1166.67 133.91,1165.12 130.81,1165.12 130.81,1163.58 126.18,1163.58 126.18,1162.03 124.63,1162.03 124.63,1191.41 127.72,1191.41 127.72,1192.96 141.64,1192.96 141.64,1191.41 143.19,1191.41 143.19,1188.32 144.73,1188.32 144.73,1183.68 146.28,1183.68 146.28,1177.49 147.82,1177.49 147.82,1172.86 149.37,1172.86 149.37,1169.76 144.73,1169.76
  region: 249.89,1058.42 252.98,1058.42 252.98,1056.88 254.53,1056.88 254.53,1055.33 256.07,1055.33 256.07,1053.78 257.62,1053.78 257.62,1049.14 259.16,1049.14 259.16,1036.77 257.62,1036.77 257.62,1032.13 256.07,1032.13 256.07,1029.04 254.53,1029.04 254.53,1027.49 251.43,1027.49 251.43,1025.95 246.79,1025.95 246.79,1024.4 239.06,1024.4 239.06,1025.95 232.88,1025.95 232.88,1027.49 231.33,1027.49 231.33,1029.04 229.78,1029.04 229.78,1030.59 228.24,1030.59 228.24,1033.68 226.69,1033.68 226.69,1052.24 228.24,1052.24 228.24,1055.33 229.78,1055.33 229.78,1056.88 231.33,1056.88 231.33,1058.42 235.97,1058.42 235.97,1059.97 249.89,1059.97 hole: 246.79,1053.78 237.52,1053.78 237.52,1052.24 235.97,1052.24 235.97,1050.69 234.42,1050.69 234.42,1049.14 232.88,1049.14 232.88,1036.77 234.42,1036.77 234.42,1033.68 235.97,1033.68 235.97,1032.13 248.34,1032.13 248.34,1033.68 249.89,1033.68 249.89,1035.23 251.43,1035.23 251.43,1039.87 252.98,1039.87 252.98,1046.05 251.43,1046.05 251.43,1050.69 249.89,1050.69 249.89,1052.24 246.79,1052.24
  region: 195.76,1059.97 212.77,1059.97 212.77,1058.42 215.87,1058.42 215.87,1056.88 217.41,1056.88 217.41,1055.33 218.96,1055.33 218.96,1053.78 220.51,1053.78 220.51,1050.69 222.05,1050.69 222.05,1033.68 220.51,1033.68 220.51,1030.59 218.96,1030.59 218.96,1029.04 217.41,1029.04 217.41,1027.49 214.32,1027.49 214.32,1025.95 209.68,1025.95 209.68,1024.4 201.95,1024.4 201.95,1025.95 197.31,1025.95 197.31,1027.49 194.22,1027.49 194.22,1029.04 192.67,1029.04 192.67,1032.13 191.12,1032.13 191.12,1035.23 189.58,1035.23 189.58,1073.89 195.76,1073.89 hole: 209.68,1053.78 195.76,1053.78 195.76,1038.32 197.31,1038.32 197.31,1035.23 198.86,1035.23 198.86,1033.68 200.4,1033.68 200.4,1032.13 212.77,1032.13 212.77,1033.68 214.32,1033.68 214.32,1036.77 215.87,1036.77 215.87,1046.05 215.87,1047.6 214.32,1047.6 214.32,1050.69 212.77,1050.69 212.77,1052.24 209.68,1052.24
  region: 344.22,1059.97 359.68,1059.97 359.68,1058.42 364.32,1058.42 364.32,1056.88 365.87,1056.88 365.87,1055.33 367.41,1055.33 367.41,1053.78 368.96,1053.78 368.96,1049.14 370.51,1049.14 370.51,1036.77 368.96,1036.77 368.96,1032.13 367.41,1032.13 367.41,1029.04 365.87,1029.04 365.87,1027.49 362.77,1027.49 362.77,1025.95 355.04,1025.95 355.04,1024.4 351.95,1024.4 351.95,1025.95 345.76,1025.95 345.76,1027.49 342.67,1027.49 342.67,1029.04 341.12,1029.04 341.12,1030.59 339.58,1030.59 339.58,1035.23 338.03,1035.23 338.03,1073.89 344.22,1073.89 hole: 359.68,1053.78 344.22,1053.78 344.22,1036.77 345.76,1036.77 345.76,1033.68 347.31,1033.68 347.31,1032.13 351.95,1032.13 351.95,1030.59 356.59,1030.59 356.59,1032.13 361.23,1032.13 361.23,1033.68 362.77,1033.68 362.77,1036.77 364.32,1036.77 364.32,1047.6 362.77,1047.6 362.77,1050.69 361.23,1050.69 361.23,1052.24 359.68,1052.24

## Silkscreen, mask and mechanical layers (free items; w line width, h text height)
Top Overlay:
  drawing of 11 lines, arcs and shapes, not listed
  text "DVL Interface" at 260,1640 h50
  text "9/26/24" at 260,1560 h40
  text "RevA" at 260,1490 h40
  text "Mark Turner" at 260,1420 h40
  text "CU Robosub" at 260,1330 h40
  text "TX" at 480,745 h40
  text "RX" at 480,645 h40
  text "TD+" at 460.01,545 h40
  text "GND" at 194,526 h40
  text "TD-" at 460.01,455 h40
  text "RD+" at 460.01,345 h40
  text "RD-" at 460.01,245 h40
  text "VIN" at 199,242 h40
  text "VIN" at 463.34,145 h40
  text "VIN" at 870,140 h40
  text "GND" at 460.01,55 h40
  text "GND" at 865,35 h40
Bottom Overlay:
  drawing of 39 lines, arcs and shapes, not listed
Top Solder:
  drawing of 6 lines, arcs and shapes, not listed

## Text inside footprints (layer, text, board x,y; h text height)
J2: Mechanical 13 "PCB EDGE" at 1839.21,1309.53 h32 r90